# Altium PCB PCB1.PcbDoc
Units mil, origin at the board's own origin, x right, y up, seen from the top; angles counter-clockwise.
Board outline 1060 x 990.63 mil, 2 copper layers (Top Layer, Bottom Layer), stack 59.8 mil thick; 26 components, 16 nets, 77 pads, 24 vias.
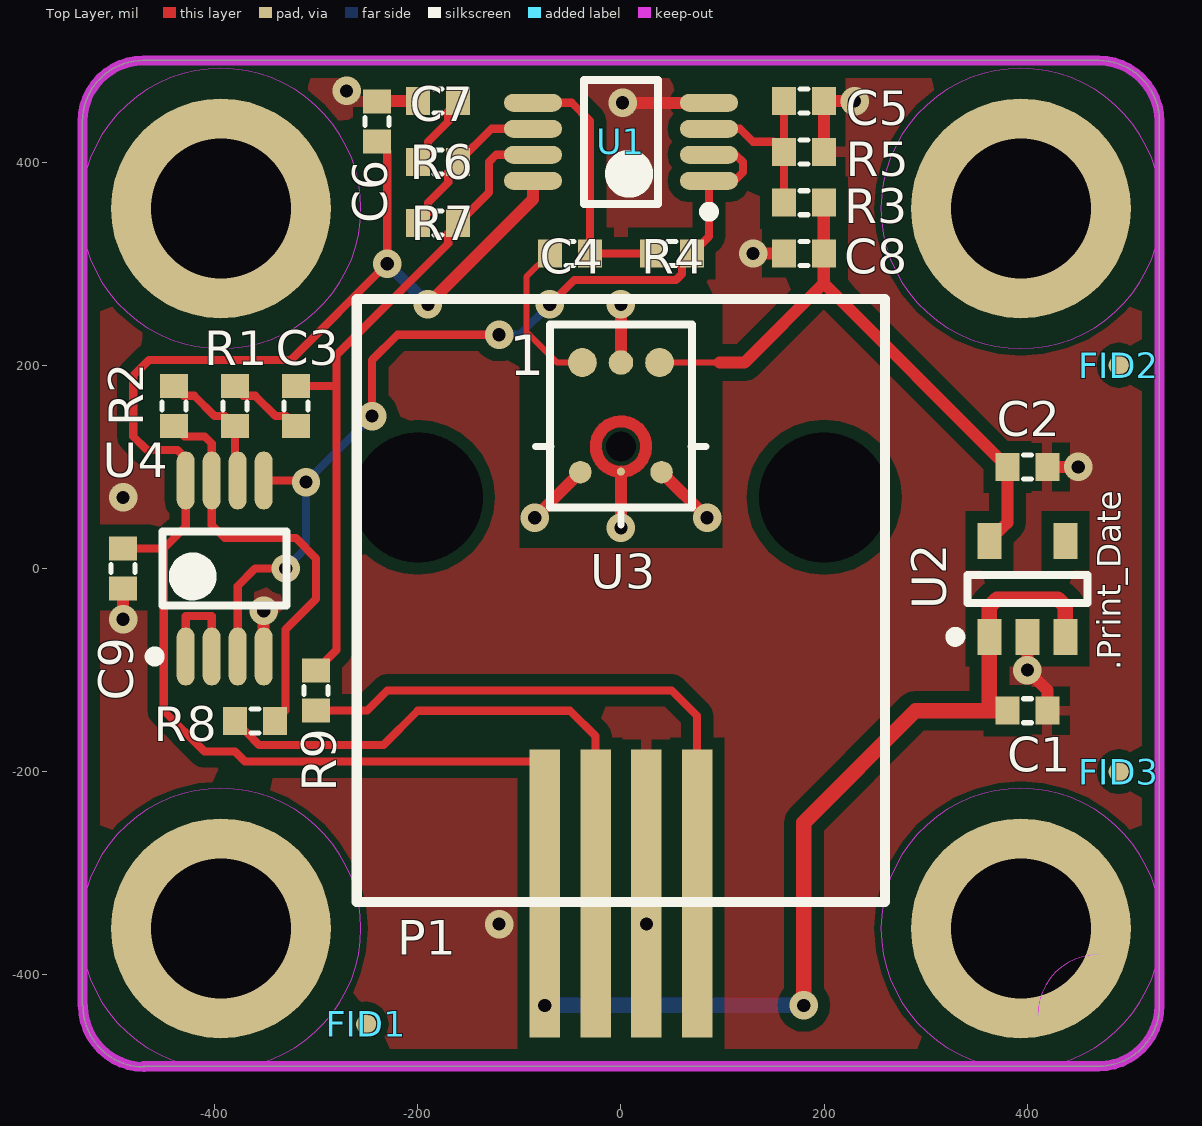
[diagram p0: Top Layer view]
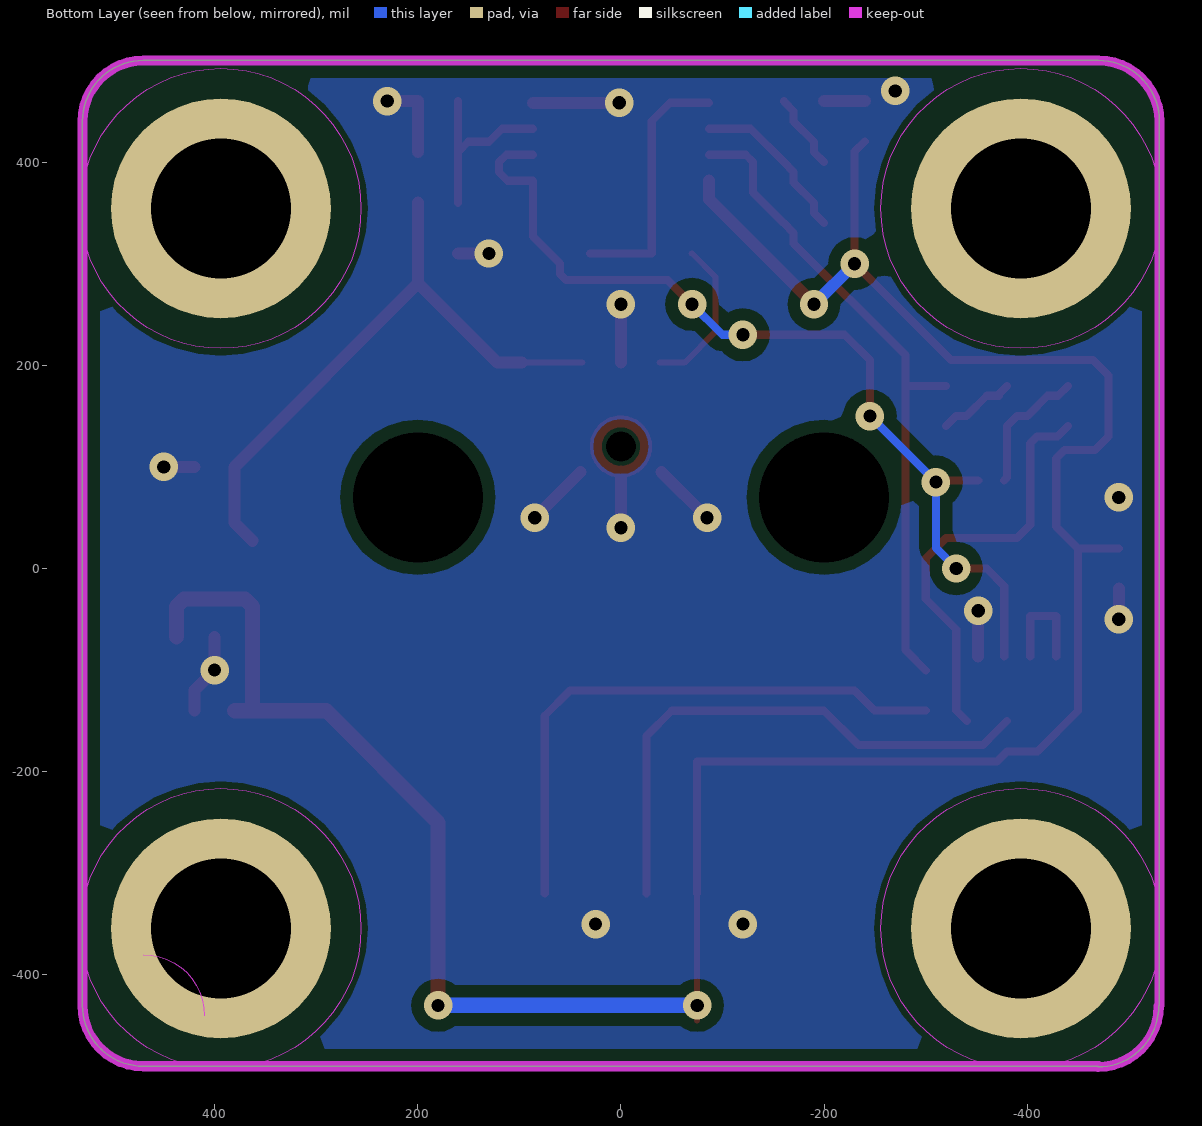
[diagram p1: Bottom Layer view, seen from below]

## Layer stack, top to bottom
Top Solder: solder mask 0.4, Solder Resist, Dk 3.5
Top Layer: signal copper 1.4
Dielectric 1: dielectric 57, FR-4, Dk 4.8
Bottom Layer: signal copper 1.4
Bottom Solder: solder mask 0.4, Solder Resist, Dk 3.5

## Board outline
-530,-430 -530,440 cw(c-470,440) -470,500 470,500 cw(c470,440) 530,440 530,-430 cw(c470,-430) 470,-490 -470,-490 -469.37,-490.63 cw(c-469.37,-430.63)

## Design rules (kind name [scope] priority, off if disabled: settings)
Clearance [All] p1: gap=6 except(12: Track-Poly SMDPad-Poly THPad-Poly Via-Poly)
PolygonConnect [IsVia] p1: connectstyle=Direct reliefconductorwidth=10 reliefentries=4 polygonreliefangle="90 Angle" airgapwidth=10
PolygonConnect PolygonConnect_1 [All] p2: connectstyle=Relief reliefconductorwidth=10 reliefentries=4 polygonreliefangle="90 Angle" airgapwidth=10
RoomDefinition Sheet1 [InComponentClass('Sheet1')] p1: confinementstyle=ConfineIn formatcopy=TRUE lockcomponents=FALSE outline 1045,-3440 5090,-3440 5090,-2590 1045,-2590
RoutingVias [All] p1: holewidth=13 width=28 viastyle="Through Hole" minholewidth=13 minwidth=28 maxholewidth=13 maxwidth=28
SolderMaskExpansion [All] p1: expansion=4
Width [All] p1: maxlimit=25 minlimit=6 preferedwidth=10 minimp=50.000000 maximp=50.000000 favimp=50.000000
30 further rules are at their usual default settings.

## Components (designator, comment, footprint, x,y, rotation, side; value= is the part's Value field where it differs from the comment)
C1 "Capacitor" 0402 400,-140 r0 top
C2 "Capacitor" 0402 400,100 r0 top
C3 "Capacitor" 0402 -320,160 r90 top
C4 "Capacitor" 0402 -50,310 r0 top
C5 "Capacitor" 0402 180,460 r0 top
C6 "Capacitor" 0402 -240,440 r90 top
C7 "Capacitor" 0402 -180,460 r0 top
C8 "Capacitor" 0402 180,310 r180 top
C9 "Capacitor" 0402 -490,0 r270 top
FID1 "Fiducial" FIDUCIAL -250.72,-448.58 r0 top
FID2 "Fiducial" FIDUCIAL 490,200 r90 top
FID3 "Fiducial" FIDUCIAL 490,-200 r90 top
P1 "CON4_95503-6651" CONN_RJ11_SMT_VERTICAL 0,70 r180 top
R1 "Resistor" 0402 -380,160 r90 top
R2 "Resistor" 0402 -440,160 r90 top
R3 "Resistor" 0402 180,360 r0 top
R4 "Resistor" 0402 50,310 r0 top
R5 "Resistor" 0402 180,410 r180 top
R6 "Resistor" 0402 -180,400 r180 top
R7 "Resistor" 0402 -180,340 r180 top
R8 "Resistor" 0402 -360,-150 r180 top
R9 "Resistor" 0402 -300,-120 r270 top
U1 "OPA_DUAL" SOP127P600-8N 0,420 r180 top
U2 "MCP1824" SOT23_5 400,-20 r90 top
U3 "VM1000-R" PMM-3738-VM1000-R 0,120 r0 top
U4 "OPA_DUAL" SOP127P600-8N -390,0 r90 top

## Footprints (in the part's own frame and the unit in brackets; to place one, negate y for a bottom-side part, rotate by r counter-clockwise, add the part's x,y. Pads: shape width x height; smd on the part's side, far side on the other; paste and mask are expansions set on the pad)
0402 [mm] "Chip Resistor, 2-Leads, Body 1,0x0,5mm, IPC Medium Density"
  rect 0.6x0.7 smd mask+0.04: 1(-0.5,0) 2(0.5,0)
  silkscreen extent -0.1,-0.3 0.1,0.3, body extent -0.55,-0.27 0.55,0.28, height 0.4
CONN_RJ11_SMT_VERTICAL [mm] "95503-6651"
  rect 0.76x7.2 smd: 1(-1.905,9.9) 2(-0.635,9.9) 3(0.635,9.9) 4(1.905,9.9)
  round 0 hole 3.25: ""(-5.08,0) ""(5.08,0)
  silkscreen extent -6.6,-4.96 6.61,10.12, body extent -6.61,-4.88 6.6,12.5, height 15.65
FIDUCIAL [mil]
  rrect100% 20x20 smd mask+15: 0(0,0)
PMM-3738-VM1000-R [mm] "Piezo-MEMS microphone"
  round 0 hole 0.75 unplated paste+0 mask+0.025: 0(0,0)
  round 0.723 smd paste-0.025 mask+0.07: 1(-0.966,2.1) 4(0.966,2.1)
  round 0.562 smd paste-0.02 mask+0.025: 2(-1.015,-0.64) 3(1.015,-0.64)
  round 0.612 smd paste-0.022 mask+0.07: 5(0,2.1)
  round 0.203 smd paste-0.203 mask+0: 6(0,-0.625)
  Top Layer lines w0.3: -0.63,0 ccw(c0,0) 0,-0.63 ccw(c0,0) -0.63,0
  silkscreen extent -2.13,-1.96 2.13,3.05, body extent -1.5,-1.15 1.5,2.65, height 1.09
SOP127P600-8N [mm]
  oval 1.45x0.45 smd mask+0.04: 1(-2.2,0.975) 2(-2.2,0.325) 3(-2.2,-0.325) 4(-2.2,-0.975) 5(2.2,-0.975) 6(2.2,-0.325) 7(2.2,0.325) 8(2.2,0.975)
  silkscreen extent -2.33,-1.55 0.92,1.87, body extent -1.55,-1.55 1.55,1.55, height 1.1
SOT23_5 [mm]
  rect 0.9x0.6 smd mask+0.07: 1(-1.2,0.95) 2(-1.2,0) 3(-1.2,-0.95) 4(1.2,-0.95) 5(1.2,0.95)
  silkscreen extent -1.32,-1.5 0.35,1.92, body extent -0.87,-1.5 0.87,1.5, height 1.45

## Part data
P1: "4p4c RJ11"
U1 U4: "Dual amplifier (standard)"
U2: "Adjustable linear voltage regulator"
U3: "MIC PIEZO MEMS ANLG OMNI -38DB bottom port"

## Free pads (board coordinates)
  round 216.54 hole 137.8 unplated paste+0 mask+1: 0(-393.7,-354.33) 0(-393.7,354.33) 0(393.7,-354.33) 0(393.7,354.33)

## Via types
v1: diameter 28, hole 13, Top Layer to Bottom Layer, tented top, 24 vias

## Nets (pads, with @x,y where several pads share a name; then routed paths per layer and width w, separated by ;. In a path a pad name is that pad's centre, name@x,y a point inside that pad or via, vN(x,y) a via of type N, cw(c..) or ccw(c..) an arc to the next point about the centre after c; other vN are vias at no path point)
+3V3: C2.1 C8.1 R3.2 U2.5 U3.4 | length 608.9
  Top Layer w6: U3.4 97.32,202.68
  Top Layer w12: 97.32,202.68 121.73,202.68 199.69,280.63 ; R3.2 C8.1 199.69,280.63 ; U2.5 380.31,44.96 C2.1 199.69,280.63
+5V: C1.1 C6.1 C9.1 P1.4 U1.8 U2.1 U2.3 U4.8 | length 2605
  Top Layer w6: P1.4@-75,-445 v1(-75,-430) P1.4
  Top Layer w8: C9.1 -450,19.69 ; C6.1 -230,410.32 v1(-230,300) -324.68,205.32 -464.68,205.32 -480,190 -480,130 -466.61,116.61 -436.61,116.61 -428.39,108.39 U4.8 -428.39,41.3 -450,19.69 ; P1.4 -75,-190 -370,-190 -380,-180 -410,-180 -450,-140 -450,19.69
  Top Layer w12: v1(-190,260) -86.61,363.39 U1.8
  Top Layer w15: v1(180,-430) 180,-250 290,-140 360,-140 ; C1.1 360,-140 ; U2.3 437.4,-37.4 430,-30 370,-30 362.6,-37.4 U2.1 362.6,-137.4 360,-140
  Bottom Layer w12: v1(-230,300) v1(-190,260)
  Bottom Layer w15: v1(-75,-430) v1(180,-430)
+VREF: R4.2 U1.1 U1.2 U4.3 U4.5 | length 939.4
  Top Layer w8: U4.3 -377.2,-17.2 -360,0 v1(-330,0) ; U4.5 -316.61,86.61 -310,80 v1(-310,85) ; v1(-245,150) -245,205 -220,230 v1(-120,230) ; v1(-70,260) -46,284 54,284 60,290 60,300.32 R4.2 86.61,326.93 U1.1 111.61,381.61 120,390 120,400 112.8,407.2 U1.2
  Bottom Layer w8: v1(-330,0) -310,20 v1(-310,85) v1(-245,150) ; v1(-120,230) -100,230 v1(-70,260)
GND: C1.2 C2.2 C5.2 C6.2 C7.1 C8.2 C9.2 P1.2 R5.1 U1.4 U2.2 U3.2 U3.3 U3.5 U3.6 U4.4 | length 682.6
  Top Layer w11.81: v1(-490,-50) C9.2 ; U4.4 v1(-351.61,-41.61) ; -220,460 -240.31,460 C7.1 ; v1(-84.76,50) U3.2 ; v1(0,40) 0,95.2 U3.6 ; U3.5 v1(0,260) ; v1(1.61,458.39) U1.4 ; U3.3 v1(84.76,50) ; v1(130,310) C8.2 ; R5.1 C5.2 v1(230,460) ; U2.2 v1(400,-100) 419.69,-119.68 C1.2 ; C2.2 v1(450,100)
  other v1: -120,-350 25,-350 -490,70 -270,470
NetC3_1: C3.1 R1.2 | length 77.4
  Top Layer w8: R1.2 -372.13,171.81 -372.13,170 -360,170 -340,150 -329.69,150 C3.1
NetC4_2: C4.2 R4.1 U1.5 | length 254.7
  Top Layer w8: U1.5 -48.39,458.39 -30.31,440.32 C4.2 R4.1
NetC5_1: C5.1 R3.1 R5.2 U1.3 | length 183.1
  Top Layer w8: U1.3 117.2,432.8 130,420 150.31,420 R5.2 ; R3.1 R5.2 ; C5.1 R5.2
NetC7_2: C7.2 R6.2 | length 76.3
  Top Layer w8: R6.2 -190,409.69 -190,420 -170,440 -170,450 -160.31,459.69 C7.2
NetP1_1: P1.1 R9.2 | length 568.3
  Top Layer w8: R9.2 -249.69,-139.68 -230,-120 50,-120 75,-145 P1.1
NetP1_3: P1.3 R8.2 | length 543.9
  Top Layer w8: R8.2 -362.13,-167.56 -362.13,-167.92 -356.27,-173.78 -233.78,-173.78 -200,-140 -50,-140 -25,-165 P1.3
NetR1_1: R1.1 R2.2 U4.6 | length 131.2
  Top Layer w8: R2.2 -430.31,170 -420,170 -400,150 -389.69,150 R1.1 -380,89.41 U4.6
NetR6_1: R6.1 R7.2 U1.6 | length 163.6
  Top Layer w8: R7.2 -190,349.69 -190,360 -170,380 -170,390.32 R6.1 -127.52,432.8 U1.6
NetU4_1: U4.1 U4.2 | length 105.6
  Top Layer w8: U4.1 -428.39,-46.61 -402.8,-46.61 U4.2
SIGNAL_AMP+: C3.2 R7.1 R9.1 U1.7 | length 657.1
  Top Layer w8: C3.2 -280.31,179.69 -280,180 ; R9.1 -280,-80.31 -280,180 ; R7.1 -170,330.32 -170,320 -280,210 -280,180 ; R7.1@-160,340 -130,370 -130,400 -122.8,407.2 U1.7
SIGNAL_AMP-: R2.1 R8.1 U4.7 | length 417.7
  Top Layer w8: R2.1 -429.69,130 -409.69,130 -402.8,123.11 U4.7 -402.8,42.8 -390,30 -320,30 -300,10 -300,-30 -330,-60 -330,-139.68 R8.1
SIGNAL_IN: C4.1 U3.1 | length 154.4
  Top Layer w6: C4.1 -70,310 -93,287 -93,233 -62.68,202.68 U3.1
pads on no net: FID1.0 FID2.0 FID3.0 P1. U2.4 U3.0

## Polygon pours and split planes (outlines as drawn)
GND on Bottom Layer "GND_L02_P004" (solid, remove dead copper, pour order 4): -600,-500 600,-500 600,600 -600,600
GND on Top Layer "GND_L01_P006" (solid, remove dead copper, pour order 6): -600,-500 600,-500 600,600 -600,600

## Keep-outs
Keep-Out Layer:
  circle w1: c-393.7,354.33 r137.8
  circle w1: c393.7,354.33 r137.8
  circle w1: c393.7,-354.33 r137.8
  circle w1: c-393.7,-354.33 r137.8
  lines w1: 410,-440 cw(c470,-440) 470,-380
  lines w10: -530,-430 -530,440 cw(c-470,440) -470,500 470,500 cw(c470,440) 530,440 530,-430 cw(c470,-430) 470,-490 -470,-490 ; -529.37,-430.63 ccw(c-469.37,-430.63) -469.37,-490.63

## Other copper
Top Layer:
  pour cut-out: 100,20 -100,20 -100,270 100,270

## Silkscreen, mask and mechanical layers (free items; w line width, h text height)
Top Overlay:
  text ".Print_Date" at 500,-100 h40 r90

## Text inside footprints (layer, text, board x,y; h text height)
U3: Top Overlay "1" at -110,190 h40